# Altium PCB PCB - ShS , FD.PcbDoc
Units mil, origin at the board's own origin, x right, y up, seen from the top; angles counter-clockwise.
Board outline 6000 x 4000 mil, 2 copper layers (Top Layer, Bottom Layer); 38 components, 32 nets, 104 pads, 0 vias.
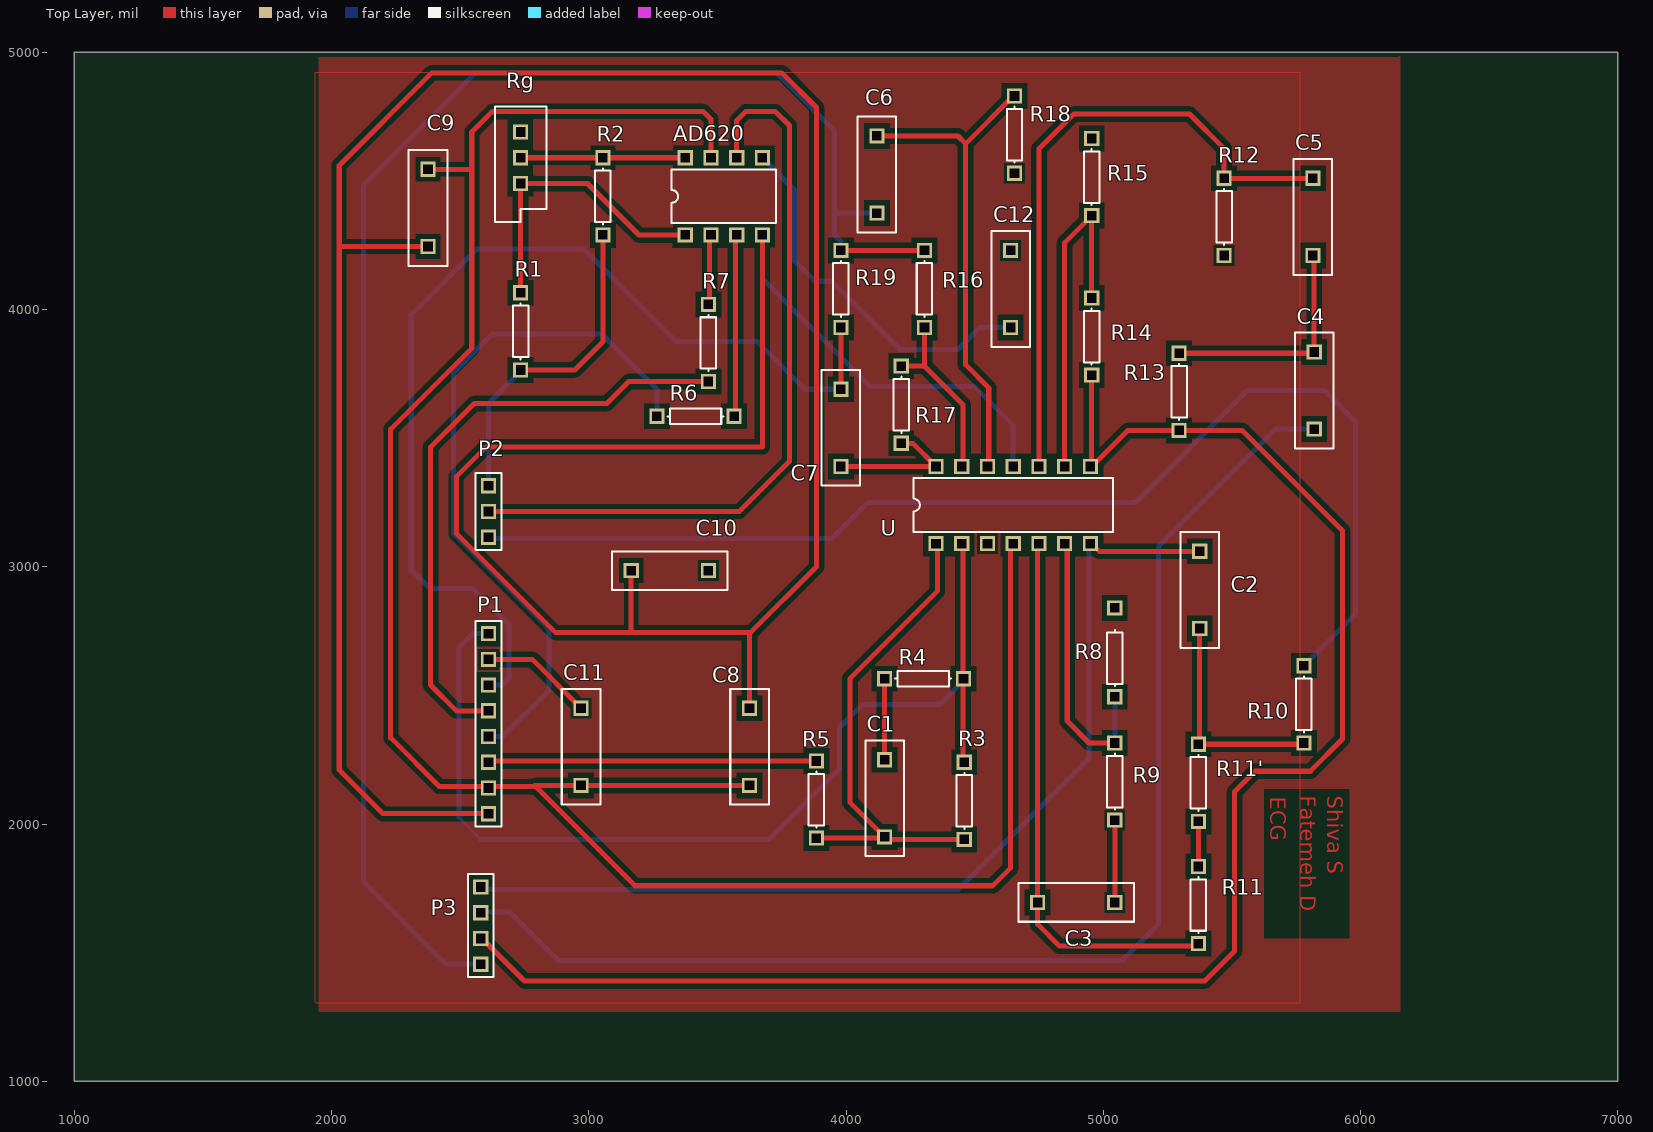
[diagram p0: Top Layer view]
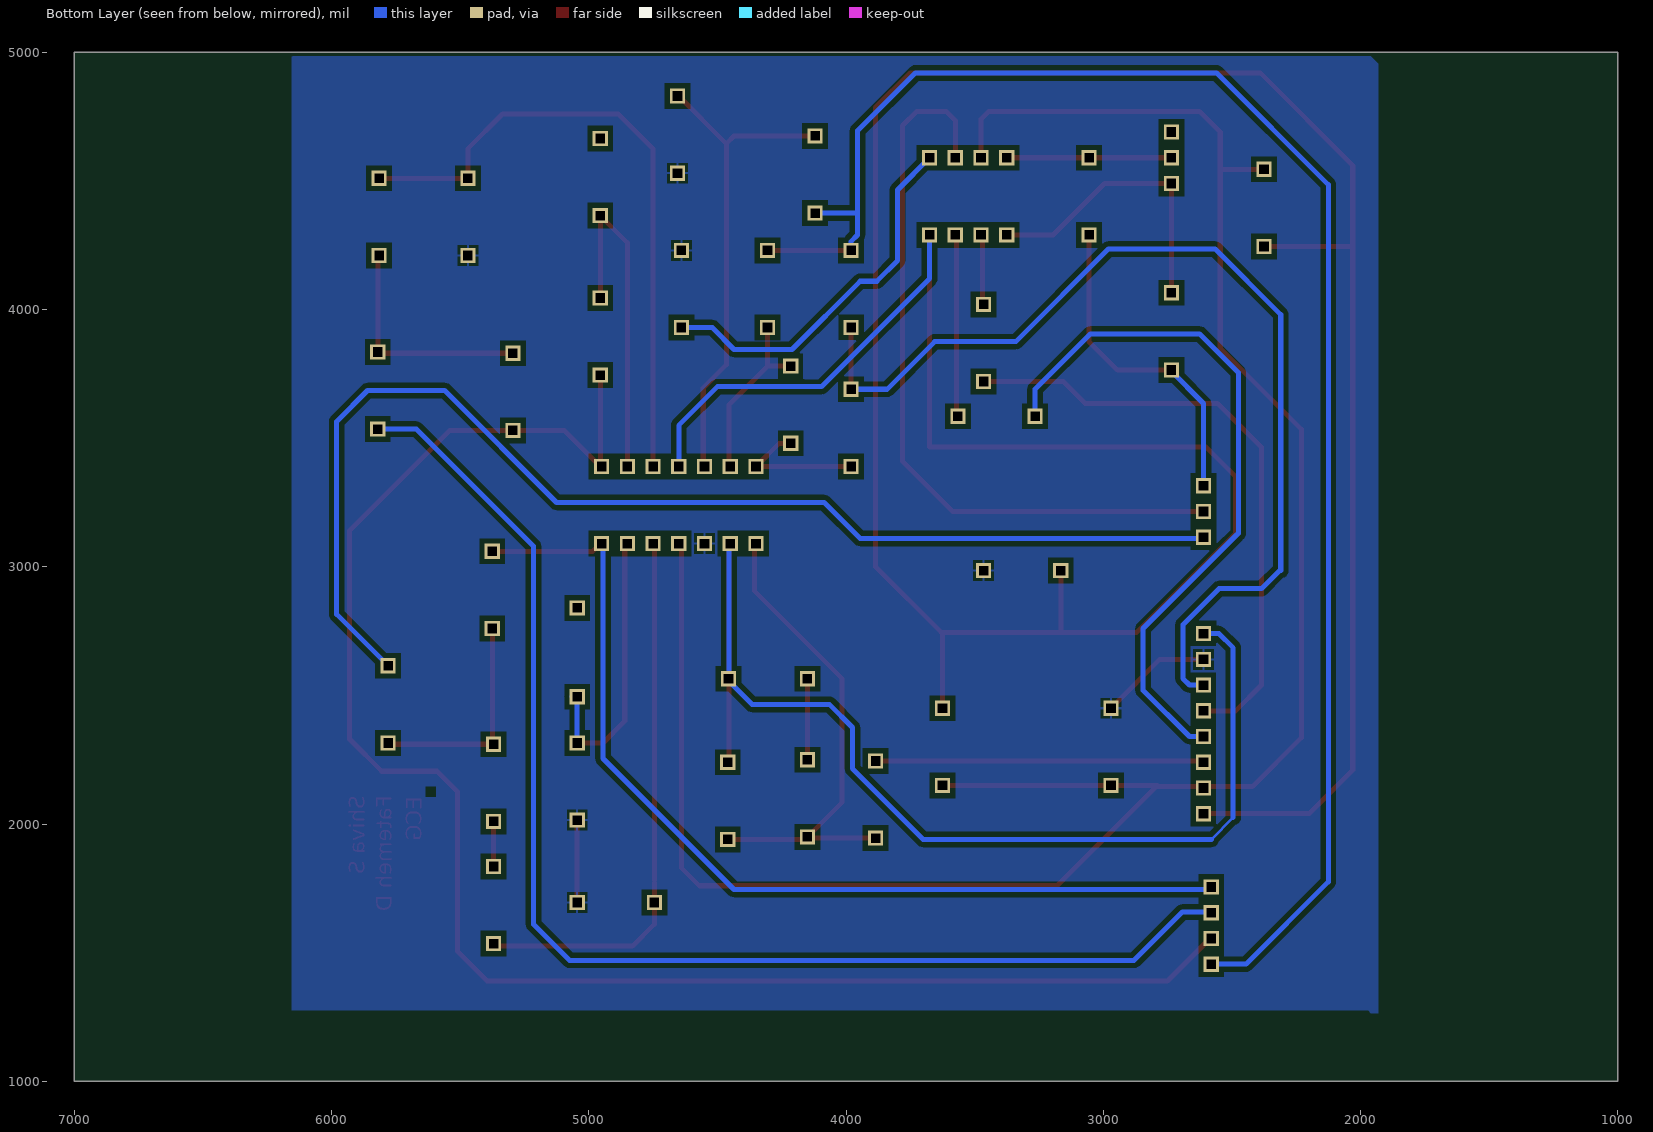
[diagram p1: Bottom Layer view, seen from below]

## Layer stack, top to bottom
Top Layer: signal copper 1.4
Dielectric: dielectric 12.6, FR-4, Dk 4.8
Bottom Layer: signal copper 1.4

## Board outline
1000,1000 7000,1000 7000,5000 1000,5000

## Design rules (kind name [scope] priority, off if disabled: settings)
Clearance [All] p1: gap=19.68
PolygonConnect [All] p1: connectstyle=Relief reliefconductorwidth=10 reliefentries=4 polygonreliefangle="90 Angle"
RoutingVias [All] p1: holewidth=28 width=50 viastyle="Through Hole" minholewidth=28 minwidth=50 maxholewidth=28 maxwidth=50
SilkscreenOverComponentPads SilkToSolderMaskClearance [IsPad] p1: minsilkscreentomaskgap=10
SolderMaskExpansion [All] p1: expansion=4
TestPointUsage FabricationTestPointUsage [All] p1: valid=0 allowmultiple=FALSE
Testpoint FabricationTestpoint [(IsPad And (OnTopLayer Or OnBottomLayer))] p1: side=3 testpointundercomponent=TRUE minsize=40 maxsize=100 preferedsize=60 minholesize=0 maxholesize=40 preferedholesize=32 testpointgrid=1 style=297 order=0123456789
Width [All] p1: maxlimit=78.74 minlimit=78.74 preferedwidth=78.74 checkconnectedcopper=TRUE
23 further rules are at their usual default settings.

## Components (designator, comment, footprint, x,y, rotation, side; value= is the part's Value field where it differs from the comment)
AD620 "AD620AN" N-8 3525,4440 r0 top
C1 "Cap" RAD-0.3 4150,2100 r90 top
C2 "Cap" RAD-0.3 5375,2910 r90 top
C3 "Cap" RAD-0.3 4895,1695 r180 top
C4 "Cap" RAD-0.3 5820,3685 r90 top
C5 "Cap" RAD-0.3 5815,4360 r90 top
C6 "Cap" RAD-0.3 4120,4525 r90 top
C7 "Cap" RAD-0.3 3980,3540 r90 top
C8 "Cap" RAD-0.3 3625,2300 r270 top
C9 "Cap" RAD-0.3 2375,4395 r90 top
C10 "Cap" RAD-0.3 3315,2985 r0 top
C11 "Cap" RAD-0.3 2970,2300 r90 top
C12 "Cap" RAD-0.3 4640,4080 r90 top
P1 "Header 8" HDR1X8 2610,2040 r90 top
P2 "Header 3" HDR1X3 2610,3315 r270 top
P3 "Header 4" HDR1X4 2580,1755 r270 top
R1 "Res1" AXIAL-0.3#1 2735,3915 r90 top
R2 "Res1" AXIAL-0.3#1 3055,4440 r90 top
R3 "Res1" AXIAL-0.3#1 4460,2090 r90 top
R4 "Res1" AXIAL-0.3#2 4300,2565 r0 top
R5 "Res1" AXIAL-0.3#1 3885,2095 r270 top
R6 "Res1" AXIAL-0.3#1 3415,3585 r0 top
R7 "Res1" AXIAL-0.3#1 3465,3870 r90 top
R8 "Res1" AXIAL-0.3#3 5045,2645 r90 top
R9 "Res1" AXIAL-0.3#1 5045,2165 r90 top
R10 "Res1" AXIAL-0.3#1 5780,2465 r270 top
R11 "Res1" AXIAL-0.3#1 5370,1685 r270 top
R11' "Res1" AXIAL-0.3#1 5370,2160 r270 top
R12 "Res1" AXIAL-0.3#1 5470,4360 r90 top
R13 "Res1" AXIAL-0.3#1 5295,3680 r270 top
R14 "Res1" AXIAL-0.3#1 4955,3895 r270 top
R15 "Res1" AXIAL-0.3#1 4955,4515 r270 top
R16 "Res1" AXIAL-0.3#1 4305,4080 r270 top
R17 "Res1" AXIAL-0.3#1 4215,3630 r270 top
R18 "Res1" AXIAL-0.3#1 4655,4680 r90 top
R19 "Res1" AXIAL-0.3#1 3980,4080 r270 top
Rg "RPot" VR5 2735,4590 r270 top
U "TL084N" N014 4650,3240 r0 top

## Footprints (in the part's own frame and the unit in brackets; to place one, negate y for a bottom-side part, rotate by r counter-clockwise, add the part's x,y. Pads: shape width x height; smd on the part's side, far side on the other; paste and mask are expansions set on the pad)
AXIAL-0.3#1 [mm] "Axial Device, Thru-Hole; 2 Leads; 0.3 in Pin Spacing"
  rect 1.5x1.5 hole 0.9 square: 1(-3.81,0) 2(3.81,0)
  silkscreen extent -2.77,-0.76 2.77,0.76
AXIAL-0.3#2 [mm] "Axial Device, Thru-Hole; 2 Leads; 0.3 in Pin Spacing"
  rect 1.5x1.5 hole 0.9 square: 1(-3.81,0)
  rect 1.5x1.5 hole 0.9 square unplated: 2(3.988,0)
  silkscreen extent -2.77,-0.76 2.77,0.76
AXIAL-0.3#3 [mm] "Axial Device, Thru-Hole; 2 Leads; 0.3 in Pin Spacing"
  rect 1.5x1.5 hole 0.9 square: 1(-3.81,0) 2(4.953,0)
  silkscreen extent -2.77,-0.76 2.77,0.76
HDR1X3 [mm] "Connector; Header; 3 Position"
  rect 1.5x1.5 hole 0.9 square: 1(0,0) 2(2.54,0) 3(5.08,0)
  silkscreen extent -1.27,-1.27 6.35,1.27
HDR1X4 [mm] "Connector; Header; 4 Position"
  rect 1.5x1.5 hole 0.9 square: 1(0,0) 2(2.54,0) 3(5.08,0) 4(7.62,0)
  silkscreen extent -1.27,-1.27 8.89,1.27
HDR1X8 [mm] "Connector; Header; 8 Position"
  rect 1.5x1.5 hole 0.9 square: 1(0,0) 2(2.54,0) 3(5.08,0) 4(7.62,0) 5(10.16,0) 6(12.7,0) 7(15.24,0) 8(17.78,0)
  silkscreen extent -1.27,-1.27 19.05,1.27
N014 [mm] "DIP; 14 Leads; Row Spacing 7.62 mm; Pitch 2.54 mm"
  rect 1.5x1.5 hole 0.9 square: 1(-7.62,-3.81) 2(-5.08,-3.81) 3(-2.54,-3.81) 4(0,-3.81) 5(2.54,-3.81) 6(5.08,-3.81) 7(7.62,-3.81) 8(7.62,3.81) 9(5.08,3.81) 10(2.54,3.81) 11(0,3.81) 12(-2.54,3.81) 13(-5.08,3.81) 14(-7.62,3.81)
  silkscreen extent -9.85,-2.65 9.85,2.65
N-8 [mm] "DIP; 8 Leads; Row Spacing 7.62 mm; Pitch 2.54 mm"
  rect 1.5x1.5 hole 0.9 square: 1(-3.81,-3.81) 2(-1.27,-3.81) 3(1.27,-3.81) 4(3.81,-3.81) 5(3.81,3.81) 6(1.27,3.81) 7(-1.27,3.81) 8(-3.81,3.81)
  silkscreen extent -5.15,-2.65 5.15,2.65
RAD-0.3 [mm] "Radial Cap, Thru-Hole; 2 Leads; 0.3 in Pin Spacing"
  rect 1.5x1.5 hole 0.9 square: 1(-3.81,0) 2(3.81,0)
  silkscreen extent -5.71,-1.91 5.71,1.91
VR5 [mm] "Thru-Hole; 3 Leads"
  rect 1.5x1.5 hole 0.9 square: 1(-2.54,0) 2(0,0) 3(2.54,0)
  silkscreen extent -5.08,-2.54 6.35,2.54

## Part data
AD620: "Low-Cost, Low-Power Instrumentation Amplifier"
C1 C2 C3 C4 C5 C6 C7 C8 C9 C10 C11 C12: "Capacitor"
P1: "Header, 8-Pin"
P2: "Header, 3-Pin"
P3: "Header, 4-Pin"
R1 R2 R3 R4 R5 R6 R7 R8 R9 R10 R11 R11' R12 R13 R14 R15 R16 R17 R18 R19: "Resistor"
Rg: "Potentiometer"
U: "JFET-Input Operational Amplifier"

## Nets (pads, with @x,y where several pads share a name; then routed paths per layer and width w, separated by ;. In a path a pad name is that pad's centre, name@x,y a point inside that pad or via, vN(x,y) a via of type N, cw(c..) or ccw(c..) an arc to the next point about the centre after c; other vN are vias at no path point)
G1IN: P1.8 R3.2 R4.2 U.2 | length 4522.7
  Top Layer w10: R3.2@4455,2255 R3.2@4470,2240
  Top Layer w19.68: R3.2@4455,2255 U.2@4455,3085
  Bottom Layer w10: 2495,2025 2580,1940
  Bottom Layer w19.68: 2495,2025 2495,2685 2550,2740 P1.8 ; 2580,1940 3700,1940 3975,2215 3975,2375 4065,2465 4365,2465 4455,2555 U.2@4455,3085
G1OUT: P2.1 R1.1 R2.1 | length 1284.4
  Top Layer w19.68: R1.1@2740,3765 2945,3765 3055,3875 R2.1
  Bottom Layer w19.68: P2.1@2610,3310 2610,3635 R1.1@2740,3765
G2IN: AD620.6 P2.2 | length 2957.2
  Top Layer w10: AD620.6@3565,4590 3575,4600 AD620.6
  Top Layer w19.68: P2.2 3585,3215 3780,3410 3780,4715 3725,4770 3610,4770 3575,4735 AD620.6@3575,4600
G2OUT: P2.3 R10.1 | length 4690.7
  Bottom Layer w19.68: P2.3@2610,3110 3945,3110 4085,3250 5125,3250 5560,3685 5860,3685 5980,3565 5980,2815 R10.1
G3IN: C2.2 P3.1 U.7 | length 3852
  Top Layer w10: C2.2 C2.2@5380,3060
  Top Layer w19.68: U.7@4955,3090 4985,3060 C2.2
  Bottom Layer w19.68: P3.1 2590,1745 4435,1745 4945,2255 4945,3075 U.7@4955,3085
G3OUT: C4.1 P3.2 | length 5031.6
  Bottom Layer w19.68: P3.2@2582.5,1657.5 2692.5,1657.5 2880,1470 5075,1470 5215,1610 5215,3080 5670,3535 C4.1
G4IN: P3.3 R13.2 R14.2 U.8 | length 6535.4
  Top Layer w10: P3.3 P3.3@2585,1555
  Top Layer w19.68: P3.3@2585,1555 2750,1390 5395,1390 5510,1505 5510,2125 5590,2205 5805,2205 5930,2330 5930,3140 5540,3530 5095,3530 4955,3390 R14.2
  Bottom Layer w10: P3.3 P3.3@2585,1555
G4OUT: C6.1 P3.4 R16.1 R19.1 | length 6361.3
  Top Layer w19.68: R19.1 R16.1
  Bottom Layer w19.68: P3.4 2445,1455 2125,1775 2125,4485 2560,4920 3730,4920 3955,4695 3955,4290 3980,4265 R19.1 ; 3960,4375 C6.1
GND: C3.1 C10.2 C11.2 C12.2 P1.7 R9.1 R12.1 R18.1 U.3 | length 764.6
  Top Layer w10: C11.2@2960,2440 C11.2@2960,2460
  Top Layer w19.68: P1.7 2780,2640 C11.2@2960,2460 ; C3.1 R9.1
LA: P1.4 R6.1 | length 2736.9
  Bottom Layer w19.68: 2475,3130 2475,3755 2625,3905 3050,3905 3265,3690 R6.1 ; 2480,3125 2845,2760 2845,2520 2665,2340 P1.4
NetAD620_1: AD620.1 R1.2 Rg.3 | length 1132.8
  Top Layer w19.68: R1.2@2735,4070 Rg.3 2995,4490 3195,4290 AD620.1@3365,4290
NetAD620_2: AD620.2 R7.2 | length 270
  Top Layer w19.68: R7.2@3470,4020 AD620.2@3470,4290
NetAD620_3: AD620.3 R6.2 | length 710
  Top Layer w19.68: R6.2@3570,3580 AD620.3@3570,4290
NetAD620_8: AD620.8 R2.2 Rg.2 | length 640
  Top Layer w19.68: Rg.2 R2.2 AD620.8
NetC1_1: C1.1 R3.1 R5.2 U.1 | length 1945.9
  Top Layer w10: R5.2@3885,1950 R5.2@3890,1945
  Top Layer w19.68: R5.2@3890,1945 4155,1945 4015,2085 4015,2565 4355,2905 U.1@4355,3090 ; C1.1@4140,1940 R3.1@4470,1940
NetC1_2: C1.2 R4.1 | length 322.1
  Top Layer w10: C1.2 C1.2@4155,2245
  Top Layer w19.68: C1.2 R4.1
NetC2_1: C2.1 R10.2 R11'.1 | length 852.1
  Top Layer w10: R11'.1 R11'.1@5375,2315
  Top Layer w19.68: R11'.1 R10.2@5775,2310 ; R11'.1@5375,2315 C2.1@5375,2755
NetC3_2: C3.2 R11.2 U.5 | length 2150.2
  Top Layer w10: 4740,1770 4745,1770 ; R11.2@5370,1525 R11.2
  Top Layer w19.68: 4745,1770 4745,1610 4830,1525 R11.2@5370,1525 ; 4745,1780 U.5@4745,3095
NetC4_2: C4.2 C5.1 R13.1 | length 894.3
  Top Layer w10: C4.2@5812.5,3830 C4.2@5817.6,3836.8
  Top Layer w19.68: R13.1 C4.2@5810.8,3830 ; C4.2 C5.1@5820,4205
NetC5_2: C5.2 R12.2 U.10 | length 2526.8
  Top Layer w19.68: U.10 4750,4625 4885,4760 5335,4760 5470,4625 R12.2 C5.2
NetC6_2: C6.2 R18.2 U.12 | length 1911.3
  Top Layer w19.68: C6.2 4435,4675 4465,4645 ; U.12@4555,3390 4555,3695 4465,3785 4465,4645 ; R18.2@4650,4830 4465,4645
NetC7_1: C7.1 R17.2 U.14 | length 547.3
  Top Layer w10: C7.1@3975,3390 C7.1
  Top Layer w19.68: C7.1 U.14 4260,3480 R17.2
NetR8_1: R8.1 R9.2 U.6 | length 1093.5
  Top Layer w19.68: U.6@4860,3085 4860,2400 4945,2315 R9.2
  Bottom Layer w19.68: R9.2 5045,2475 R8.1@5065,2495
NetR11'_2: R11'.2 R11.1 | length 170
  Top Layer w19.68: R11.1@5370,1840 R11'.2
NetR14_1: R14.1 R15.2 U.9 | length 1338.5
  Top Layer w19.68: U.9 4850,4260 R15.2 R14.1
NetR16_2: R16.2 R17.1 U.13 | length 692.1
  Top Layer w19.68: R17.1 4305,3780 ; R16.2 4305,3780 ; U.13@4455,3390 4455,3630 4305,3780
RA: P1.5 R7.1 | length 2412.4
  Top Layer w10: P1.5@2585,2415 P1.5
  Top Layer w19.68: P1.5 2485,2440 2385,2540 2385,3465 2555,3635 3070,3635 3155,3720 R7.1
RL: P1.3 R5.1 | length 1270
  Top Layer w19.68: P1.3@2615,2245 R5.1
VCC: AD620.4 C8.1 C9.1 C10.1 P1.1 U.11 | length 13199.3
  Top Layer w19.68: C9.1 2030,4245 ; P1.1 2200,2040 2030,2210 2030,4245 ; 3165,2750 C10.1 ; C8.1@3625,2455 3625,2740 ; AD620.4 3675,3465 2600,3465 2485,3350 2485,3130 2870,2745 3630,2745 3885,3000 3885,4785 3750,4920 2390,4920 2030,4560 2030,4245
  Bottom Layer w19.68: AD620.4 3675,4120 4095,3700 4500,3700 4650,3550 U.11
VEE: AD620.7 C8.2 C9.2 C11.1 P1.2 U.4 | length 8560.6
  Top Layer w10: AD620.7@3465,4590 3475,4600 AD620.7 ; U.4@4640,3075 U.4@4655,3090
  Top Layer w19.68: C9.2 2545,4545 ; P1.2@2605,2145 2420,2145 2230,2335 2230,3535 2545,3850 2545,4545 ; P1.2@2615,2145 2785,2145 ; AD620.7@3475,4600 3475,4740 3445,4770 2625,4770 2545,4690 2545,4545 ; C8.2 C11.1 2790,2150 3180,1760 4570,1760 4640,1830 U.4@4640,3075
VOUT: C7.2 P1.6 R19.2 | length 3998.7
  Top Layer w19.68: C7.2 R19.2
  Bottom Layer w19.68: 2310,2985 2310,3980 2565,4235 2980,4235 3340,3875 3655,3875 3840,3690 C7.2 ; 2315,2985 2385,2915 2550,2915 2690,2775 2690,2565 2665,2540 P1.6
VREF: AD620.5 C12.1 | length 1469.9
  Bottom Layer w19.68: AD620.5 3800,4465 3800,4190 3880,4110 3945,4110 4210,3845 4435,3845 4520,3930 C12.1
pads on no net: R8.2 R15.1 Rg.1
copper on no net: | length 6920
  Top Layer w10: 52910,93240 52910,96700 ; 97980,113755 97980,117215

## Polygon pours and split planes (outlines as drawn)
GND on Top Layer "Top Layer-No Net" (solid, pour order 14): 1950,4975 1950,1275 1955,1270 6155,1270 6155,4990 6145,4980 1950,4980
GND on Bottom Layer "Bottom Layer-No Net" (solid, pour order 12): 1960,4985 1930,4955 1930,1265 1960,1265 1970,1275 6155,1275 6155,4990 6150,4985 1960,4985
GND on Top Layer "Top Layer-No Net" (solid, shelved, pour order 8): 1935,4920 1935,1310 1940,1305 5765,1305 5765,4915 5765,4920

## Other copper
Top Layer:
  text "Fatemeh D" at 5765,2110 h60 r270
  text "Shiva S" at 5870,2110 h60 r270
  text "ECG" at 5650,2105 h60 r270
Bottom Layer: